# Altium PCB SkayboardRev3.PcbDoc
Units mil, origin at the board's own origin, x right, y up, seen from the top; angles counter-clockwise.
Board outline 13972.57 x 4222.54 mil, 2 copper layers (Top Layer, Bottom Layer); 100 components, 109 nets, 1014 pads, 0 vias.
Unrouted connection lines stored in the file: 426.
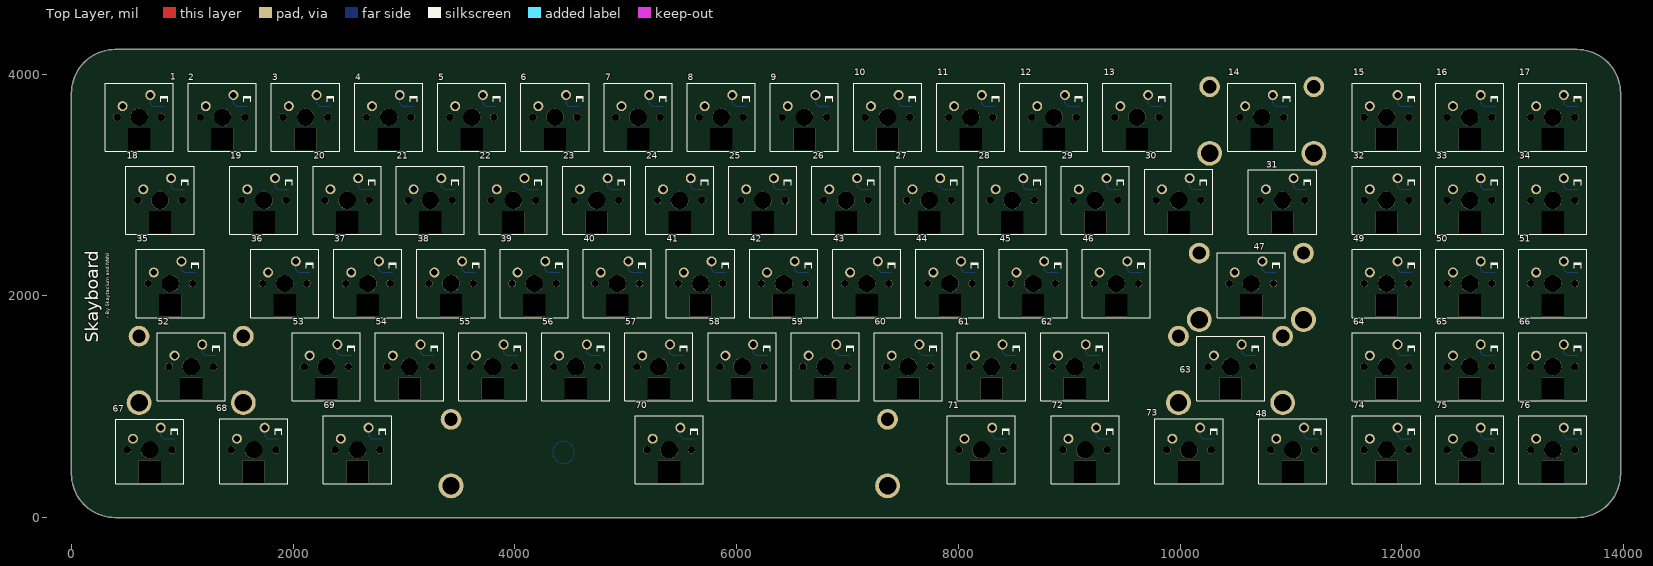
[diagram p0: Top Layer view]
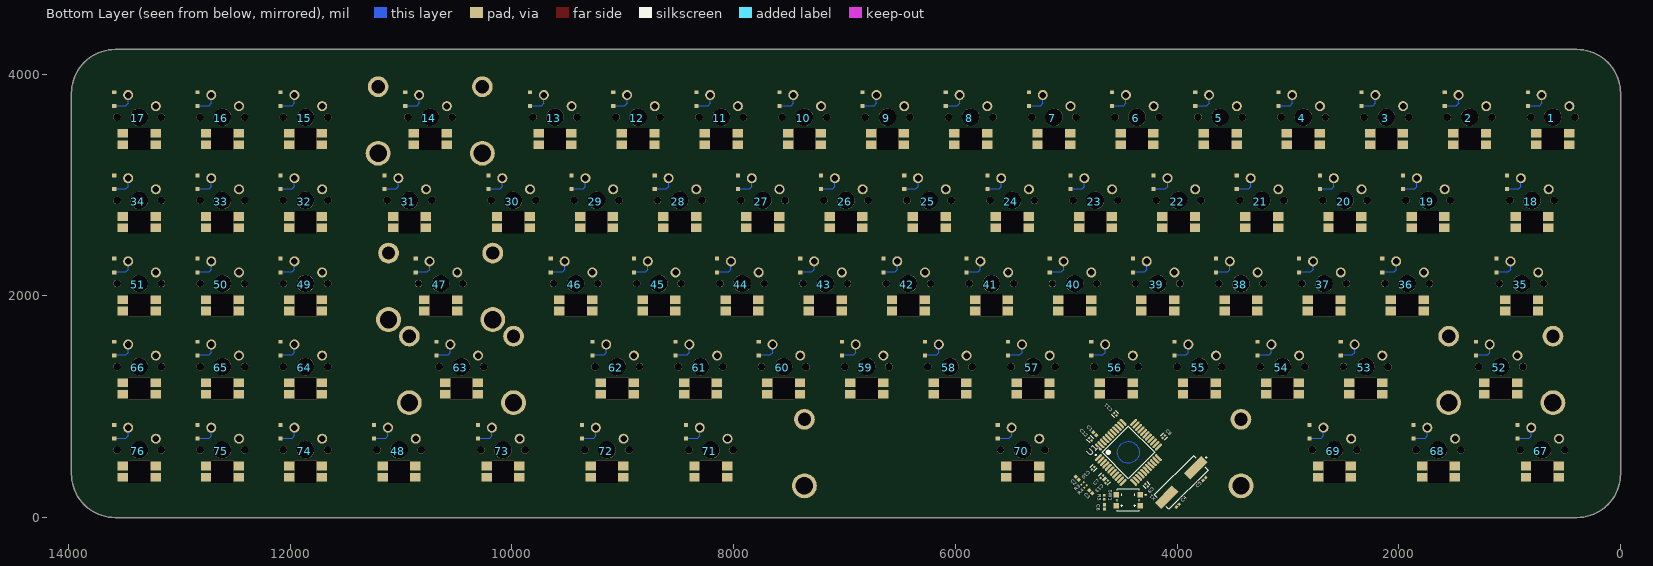
[diagram p1: Bottom Layer view, seen from below]

## Layer stack, top to bottom
Top Solder: solder mask 0.4, Solder Resist, Dk 3.5
Top Layer: signal copper 1.4
Dielectric 1: dielectric 12.6, FR-4, Dk 4.8
Bottom Layer: signal copper 1.4
Bottom Solder: solder mask 0.4, Solder Resist, Dk 3.5

## Board outline
58.09,188.06 42.95,215.02 30.04,243.12 19.35,272.1 10.94,301.83 4.92,332.15 1.29,362.86 0.04,393.78 0.09,3828.78 1.29,3859.71 4.92,3890.42 10.94,3920.74 19.35,3950.47 30.04,3979.52 42.95,4007.55 58.09,4034.52 75.23,4060.23 94.38,4084.52 115.38,4107.2 138.06,4128.22 162.37,4147.36 188.08,4164.52 215.04,4179.64 243.09,4192.55 272.12,4203.26 301.85,4211.65 332.18,4217.67 362.89,4221.33 393.81,4222.55 13578.87,4222.51 13609.73,4221.33 13640.44,4217.67 13670.75,4211.65 13700.52,4203.26 13729.5,4192.55 13757.57,4179.64 13784.53,4164.52 13810.24,4147.36 13834.5,4128.22 13857.25,4107.2 13878.24,4084.52 13897.33,4060.23 13914.53,4034.52 13929.69,4007.55 13942.61,3979.52 13953.31,3950.47 13961.62,3920.74 13967.76,3890.42 13971.35,3859.71 13972.61,3828.78 13972.61,393.78 13971.35,362.86 13967.76,332.15 13961.62,301.83 13953.31,272.1 13942.61,243.12 13929.69,215.02 13914.53,188.06 13897.33,162.34 13878.24,138.09 13857.25,115.36 13834.5,94.36 13810.24,75.21 13784.53,58.06 13757.57,42.93 13729.5,30.02 13700.52,19.33 13670.75,10.92 13640.44,4.9 13609.73,1.26 13578.87,0.01 393.81,0.07 362.89,1.26 332.18,4.9 301.85,10.92 272.12,19.33 243.09,30.02 215.04,42.93 188.08,58.06 162.37,75.21 138.06,94.36 115.38,115.36 94.38,138.09 75.23,162.34

## Design rules (kind name [scope] priority, off if disabled: settings)
BoardOutlineClearance [All] p1: gap=10 ignorepadtopadclearanceinfootprint=FALSE except(-1: Arc-OutlineEdge; 0: Arc-SplitContinuation Track-SplitContinuation SMDPad-SplitContinuation THPad-SplitContinuation Via-SplitContinuation Fill-SplitContinuation Poly-SplitContinuation Region-SplitContinuation Text-SplitContinuation)
Clearance [All] p1: gap=10 ignorepadtopadclearanceinfootprint=FALSE except(0: Arc-Hole Track-Hole SMDPad-Hole THPad-Hole Via-Hole Fill-Hole Poly-Hole Region-Hole Text-Hole)
PolygonConnect [All] p1: connectstyle=Relief reliefconductorwidth=10 reliefentries=4 polygonreliefangle="90 Angle" airgapwidth=10
RoutingVias [All] p1: holewidth=28 width=50 viastyle="Through Hole" minholewidth=28 minwidth=50 maxholewidth=28 maxwidth=50
SolderMaskExpansion [All] p1: expansion=4 istentingtop=FALSE
Width [All] p1: maxlimit=10 minlimit=10 preferedwidth=10
30 further rules are at their usual default settings.

## Components (designator, comment, footprint, x,y, rotation, side; value= is the part's Value field where it differs from the comment)
1 "Skey_LM" MX_RGB_Normal 611.29,3611.31 r0 top
2 "Skey_LM" MX_RGB_Normal 1361.31,3611.29 r0 top
3 "Skey_LM" MX_RGB_Normal 2111.31,3611.29 r0 top
4 "Skey_LM" MX_RGB_Normal 2861.31,3611.29 r0 top locked
5 "Skey_LM" MX_RGB_Normal 3611.31,3611.29 r0 top
6 "Skey_LM" MX_RGB_Normal 4361.25,3611.29 r0 top
7 "Skey_LM" MX_RGB_Normal 5111.29,3611.32 r0 top
8 "Skey_LM" MX_RGB_Normal 5861.33,3611.29 r0 top
9 "Skey_LM" MX_RGB_Normal 6611.33,3611.29 r0 top
10 "Skey_LM" MX_RGB_Normal 7361.33,3611.29 r0 top
11 "Skey_LM" MX_RGB_Normal 8111.33,3611.29 r0 top
12 "Skey_LM" MX_RGB_Normal 8861.33,3611.29 r0 top
13 "Skey_LM" MX_RGB_Normal 9611.33,3611.29 r0 top
14 "Skey_LM" MX_RGB_Normal 10736.33,3611.29 r0 top
15 "Skey_LM" MX_RGB_Normal 11861.33,3611.29 r0 top
16 "Skey_LM" MX_RGB_Normal 12611.3,3611.31 r0 top
17 "Skey_LM" MX_RGB_Normal 13361.33,3611.29 r0 top
18 "Skey" MX_RGB_Normal 798.78,2861.26 r0 top
19 "Skey" MX_RGB_Normal 1736.31,2861.29 r0 top
20 "Skey" MX_RGB_Normal 2486.31,2861.29 r0 top
21 "Skey" MX_RGB_Normal 3236.31,2861.29 r0 top
22 "Skey" MX_RGB_Normal 3986.32,2861.29 r0 top
23 "Skey" MX_RGB_Normal 4736.33,2861.29 r0 top
24 "Skey" MX_RGB_Normal 5486.33,2861.29 r0 top
25 "Skey" MX_RGB_Normal 6236.33,2861.29 r0 top
26 "Skey" MX_RGB_Normal 6986.33,2861.29 r0 top
27 "Skey" MX_RGB_Normal 7736.33,2861.29 r0 top
28 "Skey" MX_RGB_Normal 8486.33,2861.29 r0 top
29 "Skey" MX_RGB_Normal 9236.33,2861.29 r0 top
30 "Skey" MX_RGB_Normal 9986.33,2861.29 r0 top
31 "Skey" MX_RGB_Normal 10923.79,2861.27 r0 top
32 "Skey" MX_RGB_Normal 11861.33,2861.29 r0 top
33 "Skey" MX_RGB_Normal 12611.33,2861.29 r0 top
34 "Skey" MX_RGB_Normal 13361.33,2861.29 r0 top
35 "Skey_LM" MX_RGB_Normal 892.53,2111.25 r0 top
36 "Skey_LM" MX_RGB_Normal 1923.79,2111.26 r0 top
37 "Skey_LM" MX_RGB_Normal 2673.79,2111.26 r0 top
38 "Skey_LM" MX_RGB_Normal 3423.79,2111.26 r0 top
39 "Skey_LM" MX_RGB_Normal 4173.79,2111.26 r0 top
40 "Skey_LM" MX_RGB_Normal 4923.79,2111.27 r0 top
41 "Skey_LM" MX_RGB_Normal 5673.79,2111.27 r0 top
42 "Skey_LM" MX_RGB_Normal 6423.79,2111.27 r0 top
43 "Skey_LM" MX_RGB_Normal 7173.79,2111.27 r0 top
44 "Skey_LM" MX_RGB_Normal 7923.79,2111.27 r0 top
45 "Skey_LM" MX_RGB_Normal 8673.79,2111.27 r0 top
46 "Skey_LM" MX_RGB_Normal 9423.79,2111.27 r0 top
47 "Skey_LM" MX_RGB_Normal 10642.53,2111.27 r0 top
48 "Skey_LM" MX_RGB_Normal 11017.53,611.27 r0 top
49 "Skey_LM" MX_RGB_Normal 11861.33,2111.29 r0 top
50 "Skey_LM" MX_RGB_Normal 12611.33,2111.29 r0 top
51 "Skey_LM" MX_RGB_Normal 13361.33,2111.29 r0 top
52 "Skey" MX_RGB_Normal 1080.03,1361.26 r0 top
53 "Skey" MX_RGB_Normal 2298.79,1361.26 r0 top
54 "Skey" MX_RGB_Normal 3048.79,1361.26 r0 top
55 "Skey" MX_RGB_Normal 3798.79,1361.27 r0 top
56 "Skey" MX_RGB_Normal 4548.79,1361.27 r0 top
57 "Skey" MX_RGB_Normal 5298.79,1361.27 r0 top
58 "Skey" MX_RGB_Normal 6048.79,1361.27 r0 top
59 "Skey" MX_RGB_Normal 6798.79,1361.27 r0 top
60 "Skey" MX_RGB_Normal 7548.79,1361.27 r0 top
61 "Skey" MX_RGB_Normal 8298.79,1361.27 r0 top
62 "Skey" MX_RGB_Normal 9048.79,1361.27 r0 top
63 "Skey" MX_RGB_Normal 10455.05,1361.27 r0 top
64 "Skey" MX_RGB_Normal 11861.33,1361.29 r0 top
65 "Skey" MX_RGB_Normal 12611.33,1361.29 r0 top
66 "Skey" MX_RGB_Normal 13361.33,1361.29 r0 top
67 "Skey_LM" MX_RGB_Normal 705.03,611.26 r0 top
68 "Skey_LM" MX_RGB_Normal 1642.54,611.26 r0 top
69 "Skey_LM" MX_RGB_Normal 2580.04,611.26 r0 top
70 "Skey_LM" MX_RGB_Normal 5392.53,611.27 r0 top
71 "Skey_LM" MX_RGB_Normal 8205.05,611.27 r0 top
72 "Skey_LM" MX_RGB_Normal 9142.53,611.27 r0 top
73 "Skey_LM" MX_RGB_Normal 10080.05,611.27 r0 top
74 "Skey_LM" MX_RGB_Normal 11861.33,611.29 r0 top
75 "Skey_LM" MX_RGB_Normal 12611.33,611.29 r0 top
76 "Skey_LM" MX_RGB_Normal 13361.33,611.29 r0 top
C1 "100nF" CAPC1050X55X23ML05T13 4742.27,757.73 r225 bottom
C2 "47pF" CAPC1005X55X30ML05T10 4899.75,356.16 r45 bottom
C3 "47pF" CAPC1005X55X30ML05T10 4777.7,234.11 r45 bottom
C4 "22pF" CAPC1005X56X25NL10T15 3994.23,108.13 r315 bottom
C5 "22pF" CAPC1005X56X25NL10T15 3754.08,348.29 r135 bottom
C6 "100nF" CAPC1050X55X23ML05T13 4655.65,96.32 r270 bottom
C7 "100nF" FP-C0402-BB-MFG 4679.27,367.97 r315 bottom value="0.10 μF"
C8 "100nF" FP-C0402-BB-MFG 4120.22,730.17 r135 bottom value="0.10 μF"
C9 "100nF" FP-C0402-BB-MFG 4274.44,289.91 r225 bottom value="0.10 μF"
C10 "100nF" FP-C0402-BB-MFG 4758.01,446.71 r315 bottom value="0.10 μF"
C11 "100nF" FP-C0402-BB-MFG 4557.23,930.96 r45 bottom value="0.10 μF"
C12 "100nF" FP-C0402-BB-MFG 4781.64,706.55 r45 bottom value="0.10 μF"
C13 "100nF" FP-C0402-BB-MFG 4635.97,324.66 r315 bottom value="0.10 μF"
R3 "22R" RESC1005X40X25LL05T05 4852.5,308.92 r315 bottom
R4 "22R" RESC1005X40X25LL05T05 4824.94,281.36 r315 bottom
R5 "10K" RESC1005X40X25NL05T05 4655.65,182.93 r270 bottom
SW1 "7914G-1-000E" BOUR-7914G-1-000E_V 4439.12,155.37 r270 bottom
U1 "ATmega32U4-AU" 44ML_M 4439.12,588.44 r135 bottom
X1 "ABLS-8.000MHZ-B4-T" ABRA-ABLS-14.7456MHZ-B2-T_V 3962.74,316.79 r315 bottom
? "Comment" 6.25UStab 5392.53,611.27 r0 top locked
? "Comment" 1UStab 10642.53,2111.27 r0 top locked
? "Comment" 1UStab 10736.33,3611.29 r0 top locked
? "Comment" 1UStab 10455.05,1361.27 r0 top locked
? "Comment" 1UStab 1080.03,1361.26 r0 top

## Footprints (in the part's own frame and the unit in brackets; to place one, negate y for a bottom-side part, rotate by r counter-clockwise, add the part's x,y. Pads: shape width x height; smd on the part's side, far side on the other; paste and mask are expansions set on the pad)
1UStab [mil]
  round 224 hole 157: ""(-470,-325) ""(470,-325)
  round 187 hole 120: ""(-470,275) ""(470,275)
6.25UStab [mil]
  round 224 hole 157: ""(-1968.75,-325) ""(1968.75,-325)
  round 187 hole 120: ""(-1968.75,275) ""(1968.75,275)
44ML_M [mm] "Thin QFP, 44-Leads, Body 10x10mm, Pitch 0.8mm, IPC Low Density"
  oval 2.05x0.6 smd: 1(-5.7,4) 2(-5.7,3.2) 3(-5.7,2.4) 4(-5.7,1.6) 5(-5.7,0.8) 6(-5.7,0) 7(-5.7,-0.8) 8(-5.7,-1.6) 9(-5.7,-2.4) 10(-5.7,-3.2) 11(-5.7,-4) 23(5.7,-4) 24(5.7,-3.2) 25(5.7,-2.4) 26(5.7,-1.6) 27(5.7,-0.8) 28(5.7,0) 29(5.7,0.8) 30(5.7,1.6) 31(5.7,2.4) 32(5.7,3.2) 33(5.7,4)
  oval 0.6x2.05 smd: 12(-4,-5.7) 13(-3.2,-5.7) 14(-2.4,-5.7) 15(-1.6,-5.7) 16(-0.8,-5.7) 17(0,-5.7) 18(0.8,-5.7) 19(1.6,-5.7) 20(2.4,-5.7) 21(3.2,-5.7) 22(4,-5.7) 34(4,5.7) 35(3.2,5.7) 36(2.4,5.7) 37(1.6,5.7) 38(0.8,5.7) 39(0,5.7) 40(-0.8,5.7) 41(-1.6,5.7) 42(-2.4,5.7) 43(-3.2,5.7) 44(-4,5.7)
  silkscreen extent -5.82,-4.25 4.25,4.97, body extent -5,-5 5,5, height 1.2
ABRA-ABLS-14.7456MHZ-B2-T_V [mm] "SMD, 2-Leads, Body 11.4x4.7mm"
  rect 5.6x2.1 smd: 1(-4.75,0) 2(4.75,0)
  silkscreen extent -8.22,-2.35 6.35,2.35, body extent -6.35,-2.35 6.35,2.35, height 4.16
BOUR-7914G-1-000E_V [mm] "SMD, 4-Leads, Body 5x5mm, Height 4.49mm"
  rect 1.27x1.27 smd: 1(-1.27,2.75) 2(1.27,2.75) 3(1.27,-2.75) 4(-1.27,-2.75)
  silkscreen extent -2.5,-2.5 2.5,4.06, body extent -2.5,-3.1 2.5,3.1, height 4.11
CAPC1005X55X30ML05T10 [mm] "Chip Capacitor, 2-Leads, Body 1.00x0.50mm, IPC Low Density"
  rect 0.76x0.72 smd: 1(-0.48,0) 2(0.48,0)
  body extent -0.53,-0.28 0.53,0.27, height 0.55
CAPC1005X56X25NL10T15 [mm] "Chip Capacitor, 2-Leads, Body 1.00x0.50mm, IPC Medium Density"
  rect 0.68x0.64 smd: 1(-0.44,0) 2(0.44,0)
  body extent -0.55,-0.3 0.55,0.3, height 0.56
CAPC1050X55X23ML05T13 [mm] "Chip Capacitor, 2-Leads, Body 1.05x0.55mm, IPC Low Density"
  rect 0.76x0.72 smd: 1(-0.49,0) 2(0.49,0)
  body extent -0.53,-0.28 0.53,0.27, height 0.55
FP-C0402-BB-MFG [mm]
  rect 0.52x0.52 smd paste+0 mask+0: 1(-0.4,0) 2(0.4,0)
  silkscreen extent -0.5,-0.64 0.5,0.64, body extent -0.5,-0.25 0.5,0.25, height 0.55
MX_RGB_Normal [mm] "Skey's footprint"
  rect 2.5x2 smd far side: 1(-3.7,-3.7) 2(-3.7,-6.3) 3(3.7,-6.3) 4(3.7,-3.7)
  round 2.286 hole 1.499: 5(-3.81,2.54) ""(2.54,5.08)
  rect 0.95x0.9 smd far side: 6(5.715,5.715) ""(5.715,2.565)
  round 1.702 hole 1.702: ""(-5.08,0) ""(5.08,0)
  rect 5x5 hole 5 square: ""(0,-5)
  round 3.988 hole 3.988: ""(0,0)
  Bottom Layer lines w0.254: 2.54,5.08 2.54,3.175 3.15,2.565 5.715,2.565
  silkscreen extent -7.8,-7.8 7.8,7.8
RESC1005X40X25LL05T05 [mm] "Chip Resistor, 2-Leads, Body 1.00x0.50mm, IPC High Density"
  rect 0.45x0.45 smd: 1(-0.4,0) 2(0.4,0)
  body extent -0.53,-0.27 0.53,0.28, height 0.4
RESC1005X40X25NL05T05 [mm] "Chip Resistor, 2-Leads, Body 1.00x0.50mm, IPC Medium Density"
  rect 0.55x0.55 smd: 1(-0.45,0) 2(0.45,0)
  body extent -0.53,-0.27 0.53,0.28, height 0.4

## Part data
1 2 3 4 5 6 7 8 9 10 11 12 13 14 15 16 17 35 36 37 38 39 40 41 42 43 44 45 46 47 48 49 50 51 67 68 69 70 71 72 73 74 75 76: "Skey but the LED is mirrored"
18 19 20 21 22 23 24 25 26 27 28 29 30 31 32 33 34 52 53 54 55 56 57 58 59 60 61 62 63 64 65 66: "Skaytacium's keyboard's key's symbol"
C1 C6: library part CMP-2000-05439-1, "Chip Capacitor, 100 nF, +/- 10%, 16 V, -55 to 125 degC, 0402 (1005 Metric), RoHS, Tape and Reel", Capacitance=100000pF, Case Size/Dimension=0402, Dielectric=X7R, Manufacturer="Samsung Electro-Mechanics", Rated Voltage=16V, Tolerance (%)=±10%, Datasheet URL=https://datasheet.ciiva.com/29198/458718-da-01-en-vs-kondensator-0402-29198423.pdf, Datasheet Version=Nov-10, Manufacturer URL=http://www.samsungsem.com/global/index.jsp
C2 C3: library part CMP-2008-03283-1, Manufacturer=Kemet, Part Number=C0402C470J5GACTU
C4 C5: library part CMP-2008-02613-1, Manufacturer="AVX Interconnect / Elco", Part Number=04025A220JAT2A
C7 C8 C9 C10 C11 C12 C13: library part CMP-03020-023811-1, "CAP CER 0.1UF 10V X5R 0402", Capacitance="0.10 μF", Manufacturer=Kemet, Manufacturer Part Number=C0402C104K8PACTU, Package=C0402-BB, Temperature="-55°C to +125°C", Temperature Characteristic=X5R, Temperature Coefficient=15%, Temperature Range High=+125°C, Temperature Range Low=-55°C, Tolerance=0.1, Voltage Rating="10 V", Automotive=No, Category=Cap, ComponentLink2Description=Datasheet, ComponentLink2URL=https://content.kemet.com/datasheets/KEM_C1002_X7R_SMD.pdf, Device Class L1="Passive Components", Device Class L2=Capacitors, Device Class L3="Ceramic Capacitors", Digikey Description="CAP CER 0.1UF 10V X5R 0402", Height=0.55mm, Ipc Land Pattern Name=CAPC10050X50, Lead Free=Yes, Material=Ceramic, Mouser Description="Capacitor 100 nF 10 VDC 0402", Octopart=https://octopart.com/c0402c104k8pactu-kemet-140039, RoHS=TRUE
R3 R4: library part CMP-2002-08382-1, Manufacturer="Vishay Dale", Part Number=CRCW040222R0FKED
R5: library part CMP-2002-01183-1, Manufacturer=Panasonic, Part Number=ERT-J0ER103J
SW1: library part CMP-2000-05692-1, "SPST Gull Wing Sealed Key Switch, 100 mA, 16 V, -55 to 125 degC, 4-Pin SMD, RoHS, Tape and Reel", Actuator Color=N/A, Contact Rating @ Voltage=0.1A, Dielectric Strength=250VAC, Manufacturer=Bourns, Maximum AC Voltage Rating=16V, Maximum Contact Resistance=100mOhm, Minimum Insulation Resistance=100MOhm, Operating Force=2.94N, Operating Temperature=-55to125C, Package Description="4-Pin Surface Mount Device, Body 5 x 5 mm, Height 4.49 mm", Actuator Length=1.65mm, Actuator Style=RoundButton, Base Material=Thermoplastic, Body Orientation=Straight, Contact Material=Gold, Contact Plating=N/A, COO=TW, Datasheet URL=http://www.bourns.com/docs/Product-Datasheets/7914.pdf, Datasheet Version=08/2016, Dimension=5x6.2x4.19mm, ECCN=EAR99, Electrical Life=N/A, Family=7914, Ground Terminal=No, Housing Material=N/A, HTS=8536509065, Illumination Type=N/R, Manufacturer URL=http://www.bourns.com/, Maximum DC Voltage Rating=16V, Mechanical Life=100000Cycles, Mounting=SurfaceMount,GullWing, Mounting Technology=SurfaceMount, Package Reference=7914G-1-000E, Packaging=EmbossedTapeandReel, Part No=7914G-1-000E, Pole Throw Configuration=SPST, Product Weight=N/A, RoHS=Yes, Seal Description=N/A, Seal Location=N/A, Supplier=Bourns, Switch Configuration=N.O., Type=KeySwitch
U1: library part CMP-0095-00285-2, "8-bit AVR Microcontroller, 2.7-5.5V, 16MHz, 32KB Flash, 1KB EEPROM, 2.5KB SRAM, USB Controller, 44-pin TQFP, Industrial Grade (-40°C to 85°C), Ext Osc", ComponentLink1Description="Manufacturer URL", ComponentLink1URL=http://www.atmel.com/, ComponentLink2Description="ATmega16U4/32U4 Datasheet", ComponentLink2URL=http://www.atmel.com/dyn/resources/prod_documents/doc7766.pdf, ComponentLink3Description="ATmega16U4 ATmega32U4 Summary", ComponentLink3URL=http://www.atmel.com/dyn/resources/prod_documents/7766S.pdf, DatasheetVersion="revF, Nov-2010", PackageDescription="44-Pin Plastic Thin Quad Flat Pack, 10 x 10 x 1.0 mm Body, 0.8 mm Pitch (TQFP)", PackageReference=44ML, PackageVersion="rev.G, Jul-2007", RevisionNote="DatasheetVersion updated. URLs added."
X1: library part CMP-2000-05726-1, "Low Profile Crystal, 8.0 MHz, +/- 30 ppm, -20 to 70 degC, 2-Pin SMD, RoHS, Tape and Reel", Case Height=4.2mm, Case Length=11.4mm, Case Width=4.7mm, Frequency=8MHz, Frequency Stability=50PPM, Load Capacitance=18pF, Manufacturer=ABRACON, Operating Temperature Range=-20Cto+70C, Package / Case=HC-49/US, Package Description="2-Pin Surface Mount Device, Body 11.4 x 4.7 mm", Package Reference=ABLS-14.7456MHZ-B2-T, Tolerance=30PPM, Brand=ABRACON, Datasheet URL=http://www.abracon.com/Resonators/abls.pdf, Datasheet Version=04/2011, Dimensions=4.7mmWx11.4mmLx4.2mmH, ESR=80Ohms, Factory Pack Quantity=1000, Manufacturer URL=http://www.abracon.com/, Mounting Style=SMD/SMT, Mounting Technology=SurfaceMount, Package URL=http://www.abracon.com/Support/PackageDrawing/Resonators/ABLS-2D.pdf, Packaging=Reel, Product Category=Crystals, RoHS=Details, Series=ABLS, Termination Style=SMD/SMT, Type=LowProfileMicroprocessorCrystal

## Nets (pads, with @x,y where several pads share a name; then routed paths per layer and width w, separated by ;. In a path a pad name is that pad's centre, name@x,y a point inside that pad or via, vN(x,y) a via of type N, cw(c..) or ccw(c..) an arc to the next point about the centre after c; other vN are vias at no path point)
+5: C7.1 C8.1 C9.1 C10.1 C11.1 C12.1 C13.1 R5.1 U1.2 U1.6 U1.7 U1.14 U1.24 U1.34 U1.44 | length 618.4
  Bottom Layer w9.84: 4537.54,588.44 ccw(c4439.12,588.44) 4537.54,588.44
GND: 1.1 2.1 3.1 4.1 5.1 6.1 7.1 8.1 9.1 10.1 11.1 12.1 13.1 14.1 15.1 16.1 17.1 18.3 19.3 20.3 21.3 22.3 23.3 24.3 25.3 26.3 27.3 28.3 29.3 30.3 31.3 32.3 33.3 34.3 35.1 36.1 37.1 38.1 39.1 40.1 41.1 42.1 43.1 44.1 45.1 46.1 47.1 48.1 49.1 50.1 51.1 52.3 53.3 54.3 55.3 56.3 57.3 58.3 59.3 60.3 61.3 62.3 63.3 64.3 65.3 66.3 67.1 68.1 69.1 70.1 71.1 72.1 73.1 74.1 75.1 76.1 C1.1 C2.2 C3.1 C4.1 C5.1 C6.2 C7.2 C8.2 C9.2 C10.2 C11.2 C12.2 C13.2 SW1.2 SW1.3 U1.5 U1.15 U1.23 U1.35 U1.43
Net1_2: 1.2 18.2
Net1_4: 1.4 2.2
Net1_5: 1.5 18.5 35.5 52.5 67.5 U1.29
Net1_6: 1.6 2.6 3.6 4.6 5.6 6.6 7.6 8.6 9.6 10.6 11.6 12.6 13.6 14.6 15.6 16.6 17.6 U1.27
Net2_4: 2.4 3.2
Net2_5: 2.5 19.5 36.5 53.5 68.5 U1.30
Net3_4: 3.4 4.2
Net3_5: 3.5 20.5 37.5 54.5 69.5 U1.12
Net4_4: 4.4 5.2
Net4_5: 4.5 21.5 38.5 55.5 U1.31
Net5_4: 5.4 6.2
Net5_5: 5.5 22.5 39.5 56.5 U1.32
Net6_4: 6.4 7.2
Net6_5: 6.5 23.5 40.5 57.5 70.5 U1.33
Net7_4: 7.4 8.2
Net7_5: 7.5 24.5 41.5 58.5 U1.1
Net8_4: 8.4 9.2
Net8_5: 8.5 25.5 42.5 59.5 U1.36
Net9_4: 9.4 10.2
Net9_5: 9.5 26.5 43.5 60.5 U1.37
Net10_4: 10.4 11.2
Net10_5: 10.5 27.5 44.5 61.5 71.5 U1.38
Net11_4: 11.4 12.2
Net11_5: 11.5 28.5 45.5 62.5 72.5 U1.39
Net12_4: 12.4 13.2
Net12_5: 12.5 29.5 46.5 63.5 73.5 U1.18
Net13_4: 13.4 14.2
Net13_5: 13.5 30.5 47.5 U1.19
Net14_4: 14.4 15.2
Net14_5: 14.5 31.5 48.5 U1.20
Net15_4: 15.4 16.2
Net15_5: 15.5 32.5 49.5 64.5 74.5 U1.21
Net16_4: 16.4 17.2
Net16_5: 16.5 33.5 50.5 65.5 75.5 U1.25
Net17_5: 17.5 34.5 51.5 66.5 76.5 U1.22
Net18_4: 18.4 19.2
Net18_6: 18.6 19.6 20.6 21.6 22.6 23.6 24.6 25.6 26.6 27.6 28.6 29.6 30.6 31.6 32.6 33.6 34.6 U1.9
Net19_4: 19.4 20.2
Net20_4: 20.4 21.2
Net21_4: 21.4 22.2
Net22_4: 22.4 23.2
Net23_4: 23.4 24.2
Net24_4: 24.4 25.2
Net25_4: 25.4 26.2
Net26_4: 26.4 27.2
Net27_4: 27.4 28.2
Net28_4: 28.4 29.2
Net29_4: 29.4 30.2
Net30_4: 30.4 31.2
Net31_4: 31.4 32.2
Net32_4: 32.4 33.2
Net33_4: 33.4 34.2
Net34_4: 34.4 51.4
Net35_2: 35.2 52.2
Net35_4: 35.4 36.2
Net35_6: 35.6 36.6 37.6 38.6 39.6 40.6 41.6 42.6 43.6 44.6 45.6 46.6 47.6 49.6 50.6 51.6 U1.10
Net36_4: 36.4 37.2
Net37_4: 37.4 38.2
Net38_4: 38.4 39.2
Net39_4: 39.4 40.2
Net40_4: 40.4 41.2
Net41_4: 41.4 42.2
Net42_4: 42.4 43.2
Net43_4: 43.4 44.2
Net44_4: 44.4 45.2
Net45_4: 45.4 46.2
Net46_4: 46.4 47.2
Net47_4: 47.4 48.2
Net48_4: 48.4 49.2
Net48_6: 48.6 67.6 68.6 69.6 70.6 71.6 72.6 73.6 74.6 75.6 76.6 U1.28
Net49_4: 49.4 50.2
Net50_4: 50.4 51.2
Net52_4: 52.4 53.2
Net52_6: 52.6 53.6 54.6 55.6 56.6 57.6 58.6 59.6 60.6 61.6 62.6 63.6 64.6 65.6 66.6 U1.11
Net53_4: 53.4 54.2
Net54_4: 54.4 55.2
Net55_4: 55.4 56.2
Net56_4: 56.4 57.2
Net57_4: 57.4 58.2
Net58_4: 58.4 59.2
Net59_4: 59.4 60.2
Net60_4: 60.4 61.2
Net61_4: 61.4 62.2
Net62_4: 62.4 63.2
Net63_4: 63.4 64.2
Net64_4: 64.4 65.2
Net65_4: 65.4 66.2
Net66_4: 66.4 76.4
Net67_2: 67.2 U1.8
Net67_4: 67.4 68.2
Net68_4: 68.4 69.2
Net69_4: 69.4 70.2
Net70_4: 70.4 71.2
Net71_4: 71.4 72.2
Net72_4: 72.4 73.2
Net73_4: 73.4 74.2
Net74_4: 74.4 75.2
Net75_4: 75.4 76.2
NetC1_2: C1.2 U1.42
NetC2_1: C2.1 R3.1 U1.3
NetC3_2: C3.2 R4.1 U1.4
NetC4_2: C4.2 U1.16 X1.2
NetC5_2: C5.2 U1.17 X1.1
NetC6_1: C6.1 R5.2 SW1.1 SW1.4 U1.13
NetR3_2: R3.2
NetR4_2: R4.2
VCC: 1.3 2.3 3.3 4.3 5.3 6.3 7.3 8.3 9.3 10.3 11.3 12.3 13.3 14.3 15.3 16.3 17.3 18.1 19.1 20.1 21.1 22.1 23.1 24.1 25.1 26.1 27.1 28.1 29.1 30.1 31.1 32.1 33.1 34.1 35.3 36.3 37.3 38.3 39.3 40.3 41.3 42.3 43.3 44.3 45.3 46.3 47.3 48.3 49.3 50.3 51.3 52.1 53.1 54.1 55.1 56.1 57.1 58.1 59.1 60.1 61.1 62.1 63.1 64.1 65.1 66.1 67.3 68.3 69.3 70.3 71.3 72.3 73.3 74.3 75.3 76.3
pads on no net: 1. 2. 3. 4. 5. 6. 7. 8. 9. 10. 11. 12. 13. 14. 15. 16. 17. 17.4 18. 19. 20. 21. 22. 23. 24. 25. 26. 27. 28. 29. 30. 31. 32. 33. 34. 35. 36. 37. 38. 39. 40. 41. 42. 43. 44. 45. 46. 47. 48. 49. 50. 51. 52. 53. 54. 55. 56. 57. 58. 59. 60. 61. 62. 63. 64. 65. 66. 67. 68. 69. 70. 71. 72. 73. 74. 75. 76. ?. U1.26 U1.40 U1.41

## Silkscreen, mask and mechanical layers (free items; w line width, h text height)
Top Overlay:
  text "- By Skaytacium and NNNI" at 355.64,1800.03 h59.06 r90
  text "Skayboard" at 283.56,1578.38 h196.85 r90
Mechanical 1:
  lines w0.5: 162.37,75.21 138.06,94.36 115.38,115.36 94.38,138.09 75.23,162.34 58.09,188.06 42.95,215.02 30.04,243.12 19.35,272.1 10.94,301.83 4.92,332.15 1.29,362.86 0.04,393.78 0.09,3828.78 1.29,3859.71 4.92,3890.42 10.94,3920.74 19.35,3950.47 30.04,3979.52 42.95,4007.55 58.09,4034.52 75.23,4060.23 94.38,4084.52 115.38,4107.2 138.06,4128.22 162.37,4147.36 188.08,4164.52 215.04,4179.64 243.09,4192.55 272.12,4203.26 301.85,4211.65 332.18,4217.67 362.89,4221.33 393.81,4222.55 13578.87,4222.51 13609.73,4221.33 13640.44,4217.67 13670.75,4211.65 13700.52,4203.26 13729.5,4192.55 13757.57,4179.64 13784.53,4164.52 13810.24,4147.36 13834.5,4128.22 13857.25,4107.2 13878.24,4084.52 13897.33,4060.23 13914.53,4034.52 13929.69,4007.55 13942.61,3979.52 13953.31,3950.47 13961.62,3920.74 13967.76,3890.42 13971.35,3859.71 13972.61,3828.78 13972.61,393.78 13971.35,362.86 13967.76,332.15 13961.62,301.83 13953.31,272.1 13942.61,243.12 13929.69,215.02 13914.53,188.06 13897.33,162.34 13878.24,138.09 13857.25,115.36 13834.5,94.36 13810.24,75.21 13784.53,58.06 13757.57,42.93 ; 243.09,30.02 272.12,19.33 301.85,10.92 332.18,4.9 362.89,1.26 393.81,0.07 13578.87,0.01 13609.73,1.26 13640.44,4.9 13670.75,10.92 13700.52,19.33 13729.5,30.02